# Altium PCB Copy of PCB1.PcbDoc
Units mil, origin at the board's own origin, x right, y up, seen from the top; angles counter-clockwise.
Board outline 2362.2 x 1181.1 mil, 2 copper layers (Top Layer, Bottom Layer); 102 components, 75 nets, 370 pads, 53 vias.
Unrouted connection lines stored in the file: 150.
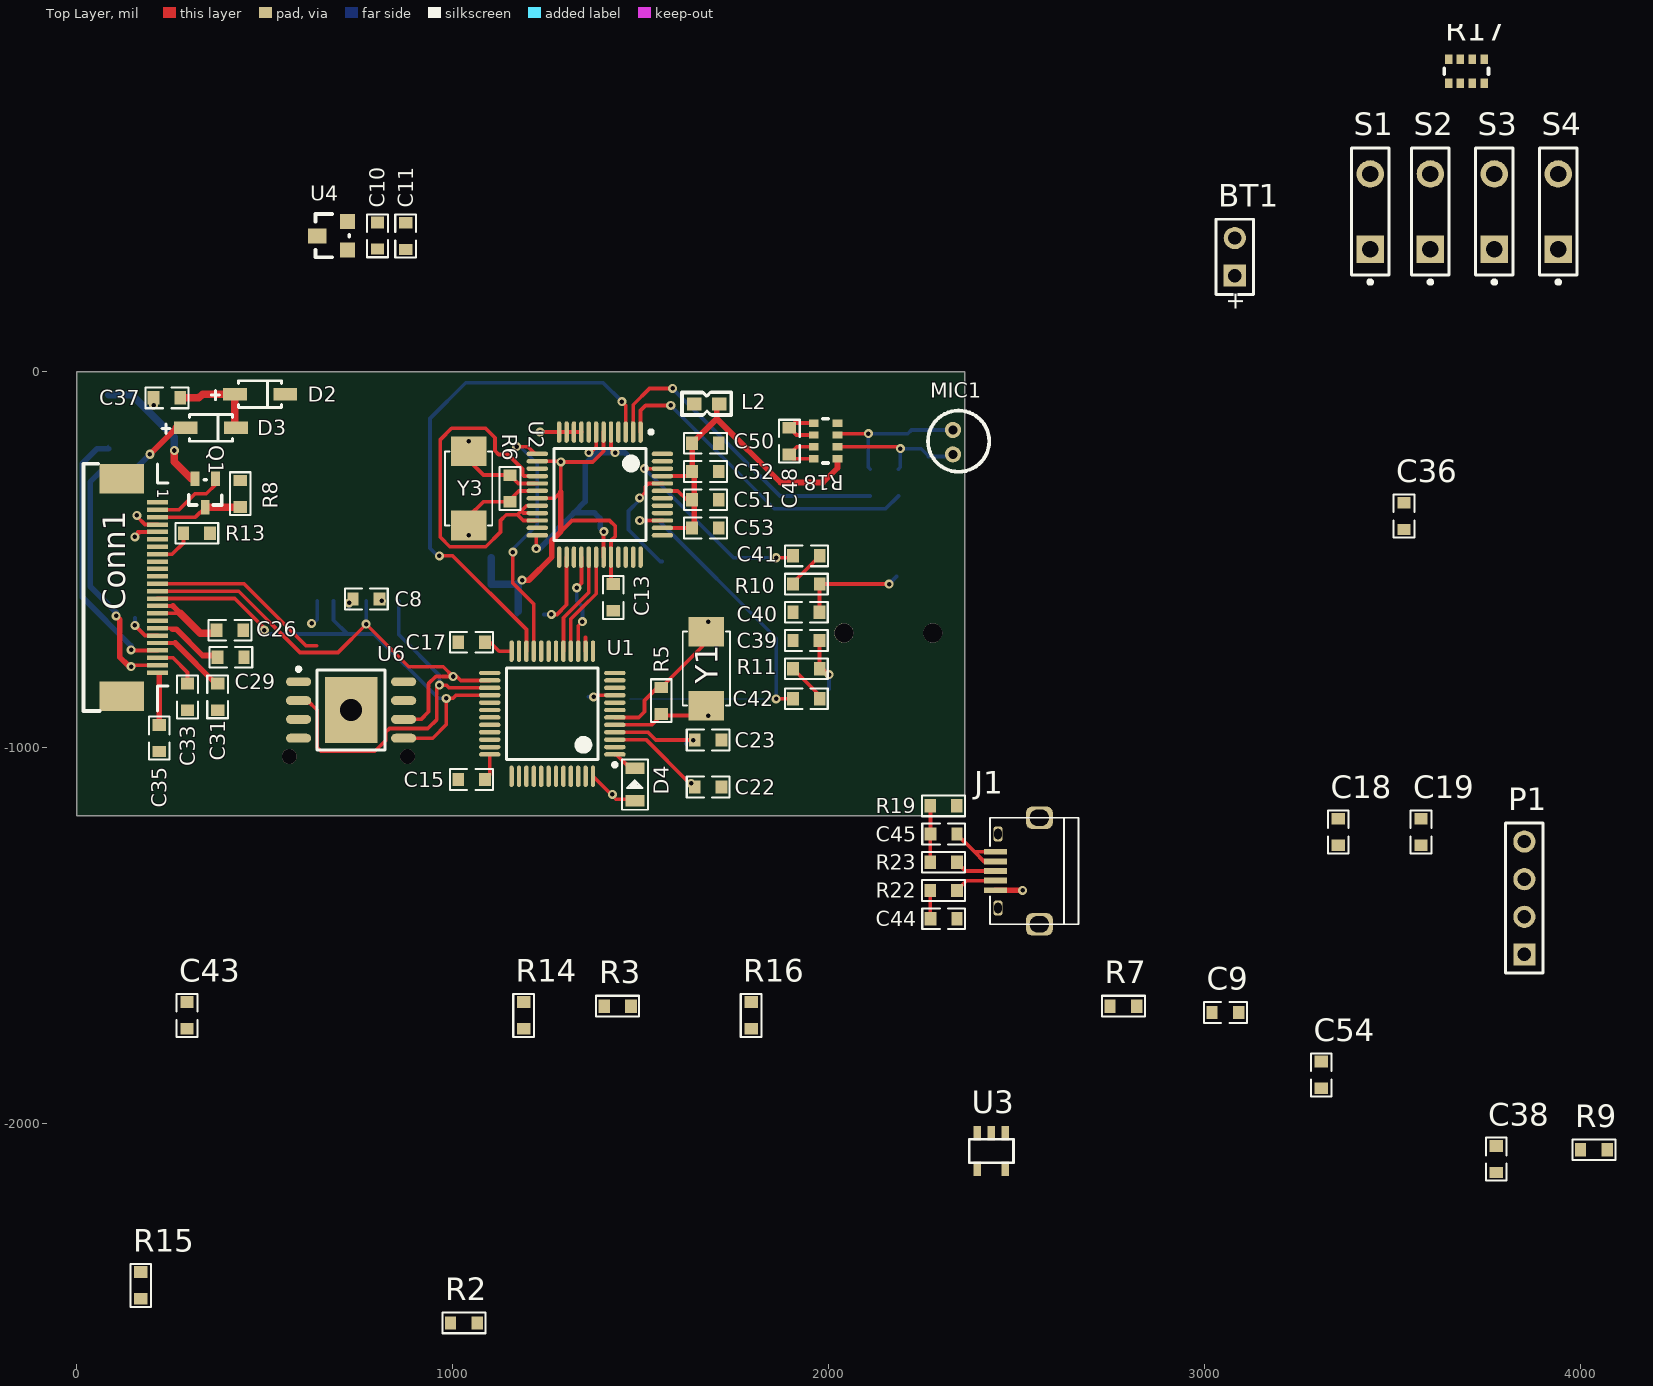
[diagram p0: Top Layer view]
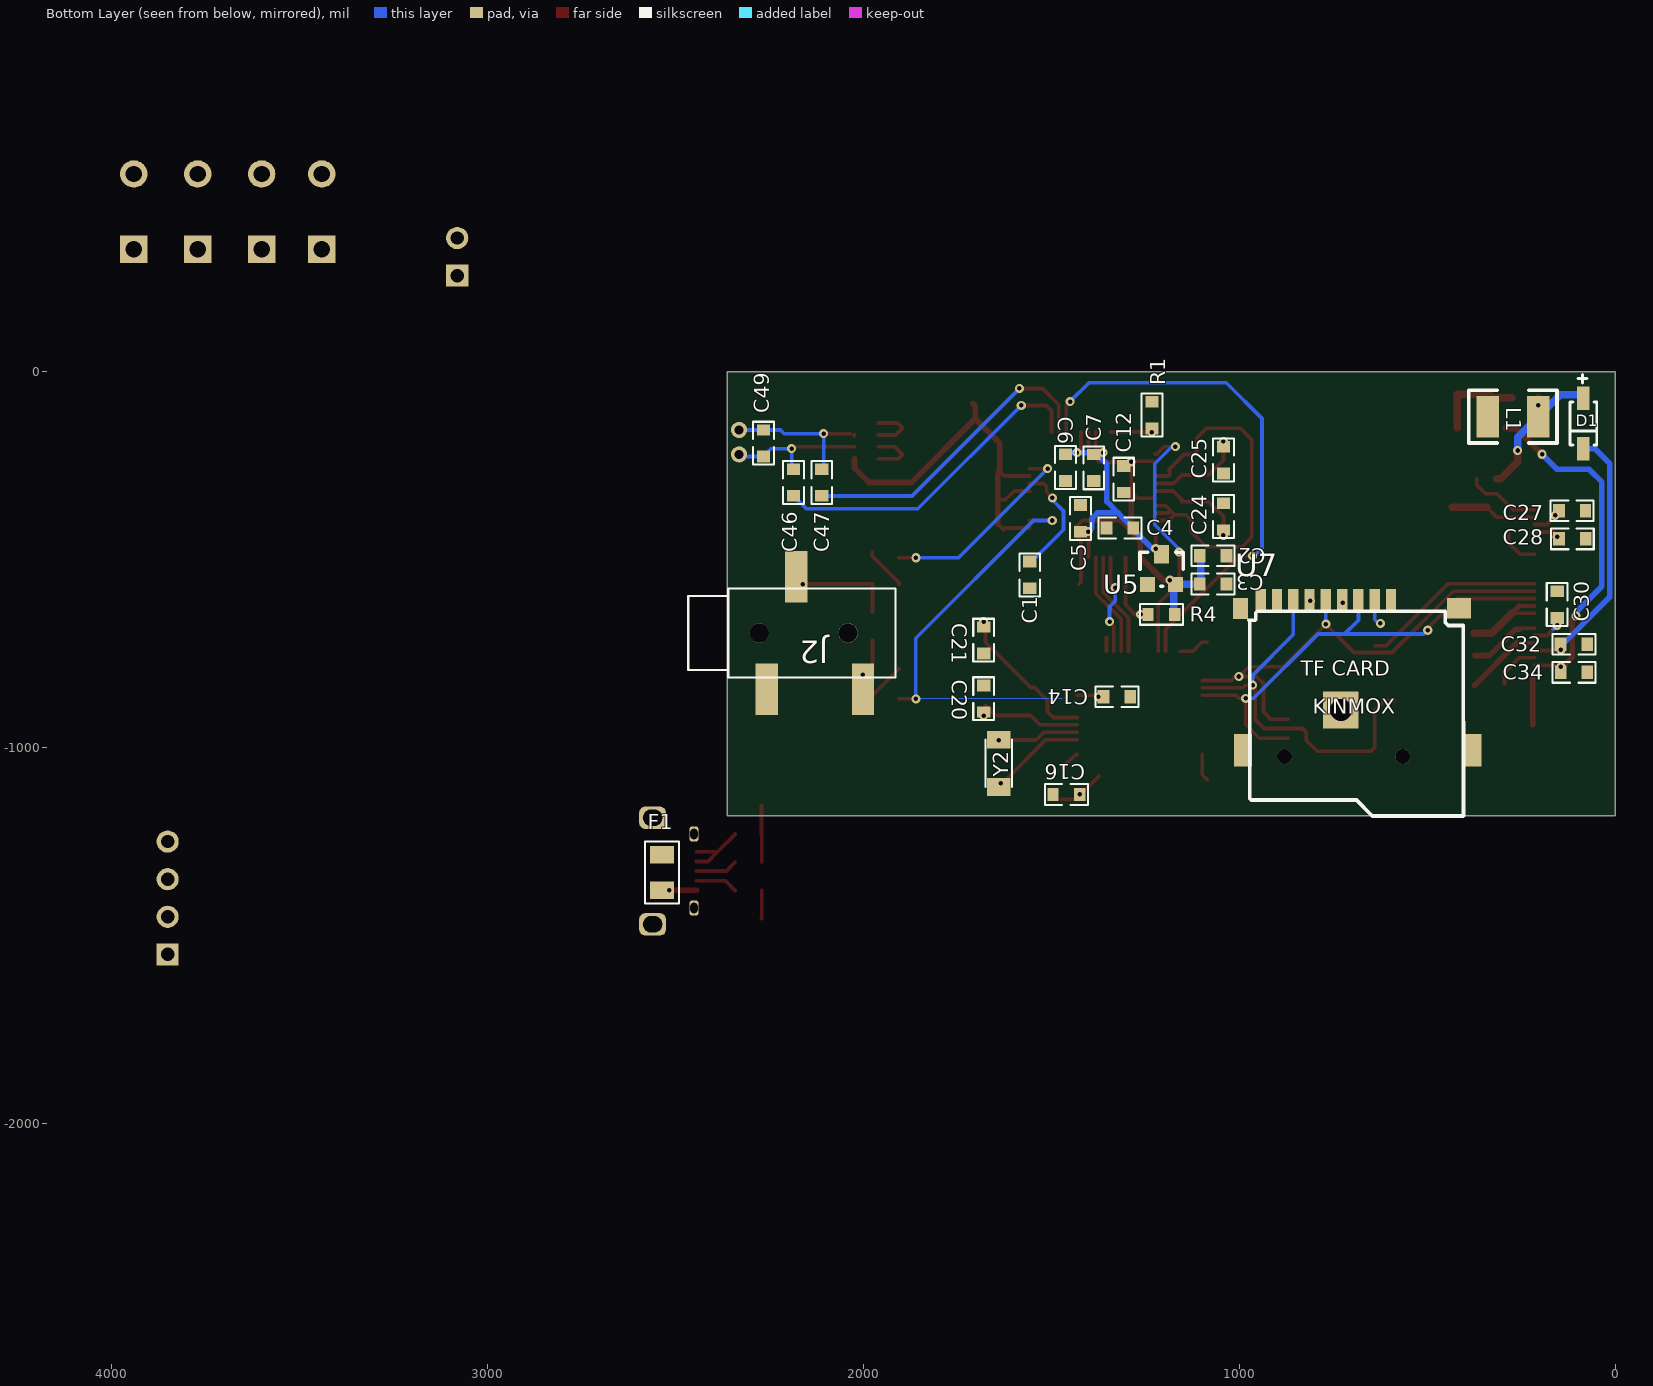
[diagram p1: Bottom Layer view, seen from below]

## Layer stack, top to bottom
Top Solder: solder mask 0.4, Solder Resist, Dk 3.5
Top Layer: signal copper 1.4
Dielectric 1: dielectric 12.6, FR-4, Dk 4.8
Bottom Layer: signal copper 1.4
Bottom Solder: solder mask 0.4, Solder Resist, Dk 3.5

## Board outline
0,-1181.1 2362.2,-1181.1 2362.2,0 0,0

## Design rules (kind name [scope] priority, off if disabled: settings)
Clearance [All] p1: gap=6 ignorepadtopadclearanceinfootprint=FALSE
HoleSize [All] p1: absolutevalues=TRUE maxlimit=100 minlimit=12 maxpercent=80.000 minpercent=20.000
PlaneConnect [All] p1: pad.planeconnectstyle=Relief pad.reliefexpansion=20 pad.reliefentries=4 pad.reliefconductorwidth=10 pad.reliefairgap=10 via.planeconnectstyle=Direct via.reliefexpansion=20 via.reliefentries=4 via.reliefconductorwidth=10 via.reliefairgap=10
PolygonConnect [All] p1: thpad.connectstyle=Relief thpad.reliefconductorwidth=10 thpad.reliefentries=4 thpad.polygonreliefangle="90 Angle" thpad.airgapwidth=10 smdpad.connectstyle=Relief smdpad.reliefconductorwidth=10 smdpad.reliefentries=4 smdpad.polygonreliefangle="90 Angle" smdpad.airgapwidth=10 via.connectstyle=Direct via.reliefconductorwidth=10 via.reliefentries=4 via.polygonreliefangle="90 Angle" via.airgapwidth=10
RoutingVias [All] p1: holewidth=12 width=24 viastyle="Through Hole" minholewidth=12 minwidth=24 maxholewidth=28 maxwidth=50
SilkToSilkClearance [All] p1: silktosilkclearance=5
SolderMaskExpansion [All] p1: expansion=4
UnRoutedNet [All] p1: checkbadconnections=TRUE
Width [All] p1: maxlimit=30 minlimit=6 preferedwidth=10
26 further rules are at their usual default settings.

## Components (designator, comment, footprint, x,y, rotation, side; value= is the part's Value field where it differs from the comment)
BT1 "Li-Pol" BAT-2 3080,305 r90 top
C1 "Cap" 0603C 1557.32,-540.91 r90 bottom value=1uF
C2 "Cap" 0603C 1070,-490 r180 bottom value=10uF
C3 "Cap" 0603C 1070,-565 r180 bottom value=100nF
C4 "Cap" 0603C 1317.76,-415.91 r0 bottom value=10uF
C5 "Cap" 0603C 1422.32,-390.47 r90 bottom value=100nF
C6 "Cap" 0603C 1462.32,-255.47 r270 bottom value=100nF
C7 "Cap" 0603C 1387.32,-255.91 r270 bottom value=100nF
C8 "Cap" 0603C 770.43,-605 r0 top value=100nF
C9 "Cap" 0603C 3055,-1704.57 r0 top value=100nF
C10 "Cap" 0603C 800,361.05 r90 top value=100nF
C11 "Cap" 0603C 875,360.18 r90 top value=10uF
C12 "Cap" 0603C 1307.32,-286.34 r90 bottom value=10uF
C13 "Cap" 0603C 1427.32,-600.91 r90 top value=100nF
C14 "Cap" 0603C 1325.43,-865 r0 bottom value=100nF
C15 "Cap" 0603C 1050.43,-1085 r0 top value=100nF
C16 "Cap" 0603C 1460,-1125 r180 bottom value=100nF
C17 "Cap" 0603C 1050.43,-720 r0 top value=100nF
C18 "Cap" 0603C 3355,-1224.57 r90 top value=100nF
C19 "Cap" 0603C 3575,-1224.57 r90 top value=100nF
C20 "Cap" 0603C 1680,-870 r90 bottom value=18pF
C21 "Cap" 0603C 1680,-714.57 r270 bottom value=18pF
C22 "Cap" 0603C 1679.57,-1105 r0 top value=18pF
C23 "Cap" 0603C 1679.57,-980 r0 top value=18pF
C24 "Cap" 0603C 1042.32,-385.91 r90 bottom value=18pF
C25 "Cap" 0603C 1042.32,-235.47 r270 bottom value=18pF
C26 "Cap" 0603C 407.57,-688 r180 top value=10uF
C27 "Cap" 0603C 115,-370 r0 bottom value=1uF
C28 "Cap" 0603C 114.57,-445 r0 bottom value=1uF
C29 "Cap" 0603C 410,-760 r180 top value=1uF
C30 "Cap" 0603C 155,-620 r270 bottom value=1uF
C31 "Cap" 0603C 375,-865 r90 top value=1uF
C32 "Cap" 0603C 110.43,-725 r0 bottom value=1uF
C33 "Cap" 0603C 295,-865.43 r90 top value=1uF
C34 "Cap" 0603C 110,-800 r0 bottom value=1uF
C35 "Cap" 0603C 220,-975 r90 top value=1uF
C36 "Cap" 0603C 3530,-384.57 r90 top value=10uF
C37 "Cap" 0603C 240,-70 r180 top value=10uF
C38 "Cap" 0603C 3775,-2094.57 r90 top value=47nF
C39 "Cap" 0603C 1940.47,-715.24 r0 top value=10nF
C40 "Cap" 0603C 1940.47,-640.24 r0 top value=10nF
C41 "Cap" 0603C 1940.91,-490.24 r180 top value=10uF
C42 "Cap" 0603C 1940.47,-870.24 r180 top value=10uF
C43 "Cap" 0603C 293.78,-1712.48 r90 top value=10nF
C44 "Cap" 0603C 2305.87,-1455 r180 top value=10nF
C45 "Cap" 0603C 2305.87,-1230 r180 top value=10nF
C46 "Cap" 0603C 2185.47,-295.24 r90 bottom value=1uF
C47 "Cap" 0603C 2110.47,-295.24 r90 bottom value=1uF
C48 "Cap" 0603C 1895.47,-185.24 r270 top value=10uF
C49 "Cap" 0603C 2265.47,-190.67 r270 bottom value=100pF
C50 "Cap" 0603C 1672.32,-190.91 r180 top value=10uF
C51 "Cap" 0603C 1672.32,-340.91 r180 top value=100nF
C52 "Cap" 0603C 1672.32,-265.91 r180 top value=100nF
C53 "Cap" 0603C 1672.32,-415.91 r180 top value=100nF
C54 "Cap" 0603C 3310,-1870.43 r90 top value=10uF
Conn1 "eInkScreen" FPC-24P-0.5 124.45,-249.41 r270 top locked
D1 "MBR0530" SOD123 85,-71.14 r90 bottom
D2 "MBR0530" SOD123 421.14,-60 r180 top locked
D3 "MBR0530" SOD123 290,-150 r180 top locked
D4 "1N4148" 0805LED2 1485,-1141.61 r90 top
F1 "PSMD075" 0805-1R 2535.43,-1332.24 r270 bottom
J1 "USB_MICRO" MicroUSB 2539.05,-1340.62 r270 top
J2 "Phonejack3" PJ-320B 2359.37,-695.24 r180 bottom
L1 "Inductor" 1210R 340,-120 r180 bottom locked value=10uH
L2 "600R/100M" L0603 1681.2,-85.91 r180 top
MIC1 "Micphone" mic_4015 2345.47,-185.24 r180 top
P1 "Dbg" HDR1X4 3850,-1550 r90 top
Q1 "Si1308" SOT323-N 342,-323 r180 top
R1 "Res3" 0603R 1232.32,-115.91 r270 bottom value=100K
R2 "Res3" 0603R 1030,-2530 r0 top value=100K
R3 "Res3" 0603R 1438.78,-1687.48 r0 top value=2K
R4 "Res3" 0603R 1207.32,-645.91 r180 bottom value=100K
R5 "Res3" 0603R 1555,-875.43 r270 top value=1M
R6 "Res3" 0603R 1152.32,-310.91 r270 top value=1M
R7 "Res3" 0603R 2783.78,-1687.48 r0 top value=10K
R8 "Res3" 0603R 435,-325 r270 top value=3
R9 "Res3" 0603R 4035,-2069.57 r0 top value=10
R10 "Res3" 0603R 1940.47,-565.24 r180 top value=20
R11 "Res3" 0603R 1940.47,-790.24 r180 top value=20
R13 "Res3" 0603R 319.57,-430 r0 top value=10K
R14 "Res3" 0603R 1188.78,-1712.48 r90 top value=8K
R15 "Res3" 0603R 170.63,-2430.28 r90 top value=22K
R16 "Res3" 0603R 1793.78,-1712.48 r90 top value=10K
R17 "1K" YC164 3742.99,767.01 r180 top
R18 "1K" YC164 1960.47,-231.73 r90 top
R19 "Res3" 0603R 2305.43,-1155 r180 top value=10K
R22 "Res3" 0603R 2305.43,-1380 r0 top value=22
R23 "Res3" 0603R 2305.43,-1305 r0 top value=22
S1 "SW-PB" SPST-2 3440,425.43 r90 top
S2 "SW-PB" SPST-2 3600,425.43 r90 top
S3 "SW-PB" SPST-2 3770,425.43 r90 top
S4 "SW-PB" SPST-2 3940,425.43 r90 top
U1 "GD32F103CBT6" LQFP48-7x7 1265,-910 r180 top
U2 "VS1053" LQFP48-7x7 1391.54,-327.24 r270 top locked
U3 "LTC4054-4.2C" SOT23-5 2469.8,-2025.51 r0 top
U4 "PT5110-3V3" SOT23 720.63,318.73 r90 top
U5 "PT5110-1V8" SOT23 1249.2,-566.54 r180 bottom
U6 "GD5F4GQ4UCYID" TSOP8+WSON8-6X5 730,-900 r0 top locked
U7 "SD_Card" TF_self-eject 596.85,-610 r180 bottom locked
Y1 "8M" XTAL-5032 1675,-790 r270 top
Y2 "32.768K" XTAL-3215 1640,-1042.01 r270 bottom
Y3 "12.288M" XTAL-5032 1042.32,-310.91 r270 top

## Footprints (in the part's own frame and the unit in brackets; to place one, negate y for a bottom-side part, rotate by r counter-clockwise, add the part's x,y. Pads: shape width x height; smd on the part's side, far side on the other; paste and mask are expansions set on the pad)
0603C [mm]
  rect 0.762x0.9 smd: 1(-0.9,0)
  rect 0.8x0.9 smd: 2(0.9,0)
  silkscreen extent -1.45,-0.7 1.45,0.7
0603R [mm]
  rect 0.762x0.9 smd: 1(-0.9,0)
  rect 0.8x0.9 smd: 2(0.9,0)
  silkscreen extent -1.45,-0.7 1.45,0.7
0805-1R [mm]
  rect 1.2x1.6 smd: 1(-1.2,0) 2(1.2,0)
  silkscreen extent -2.1,-1.15 2.1,1.15
0805LED2 [mm]
  rect 0.8x1.27 smd: 1(0,0) 2(2.2,0)
  silkscreen extent -0.6,-0.89 2.8,0.89
1210R [mil]
  rect 60x110 smd: 1(0,0) 2(135,0)
  silkscreen extent -50,-70 185,70
BAT-2 [mm] "Battery; 2 Leads"
  rect 1.5x1.5 hole 0.9: 1(-1.27,0)
  round 1.5 hole 0.9: 2(1.27,0)
  silkscreen extent -2.54,-1.27 2.54,1.27
FPC-24P-0.5 [mm]
  rect 0.3x1.4 smd: 1(2.5,2.3) 2(3,2.3) 3(3.5,2.3) 4(4,2.3) 5(4.5,2.3) 6(5,2.3) 7(5.5,2.3) 8(6,2.3) 9(6.5,2.3) 10(7,2.3) 11(7.5,2.3) 12(8,2.3) 13(8.5,2.3) 14(9,2.3) 15(9.5,2.3) 16(10,2.3) 17(10.5,2.3) 18(11,2.3) 19(11.5,2.3) 20(12,2.3) 21(12.5,2.3) 22(13,2.3) 23(13.5,2.3) 24(14,2.3)
  rect 2x3 smd: 25(15.6,-0.1) 26(0.9,-0.1)
  silkscreen extent -0.1,-2.7 16.6,3, body extent 0.2,-2.86 16.29,3.04, height 2
HDR1X4 [mm] "Connector; Header; 4 Position"
  rect 1.5x1.5 hole 0.9: 1(0,0)
  round 1.5 hole 0.9: 2(2.54,0) 3(5.08,0) 4(7.62,0)
  silkscreen extent -1.27,-1.27 8.89,1.27
L0603 [mil]
  rect 38x35 smd: 1(-28,0) 2(38.87,0)
  silkscreen extent -60,-31 71,30
LQFP48-7x7 [mm] "TSQFP, 48-Leads, Body 7.00x7.00mm, Pitch 0.50mm, IPC Medium Density"
  oval 1.45x0.3 smd: 1(-4.225,2.75) 2(-4.225,2.25) 3(-4.225,1.75) 4(-4.225,1.25) 5(-4.225,0.75) 6(-4.225,0.25) 7(-4.225,-0.25) 8(-4.225,-0.75) 9(-4.225,-1.25) 10(-4.225,-1.75) 11(-4.225,-2.25) 12(-4.225,-2.75) 25(4.225,-2.75) 26(4.225,-2.25) 27(4.225,-1.75) 28(4.225,-1.25) 29(4.225,-0.75) 30(4.225,-0.25) 31(4.225,0.25) 32(4.225,0.75) 33(4.225,1.25) 34(4.225,1.75) 35(4.225,2.25) 36(4.225,2.75)
  oval 0.3x1.45 smd: 13(-2.75,-4.225) 14(-2.25,-4.225) 15(-1.75,-4.225) 16(-1.25,-4.225) 17(-0.75,-4.225) 18(-0.25,-4.225) 19(0.25,-4.225) 20(0.75,-4.225) 21(1.25,-4.225) 22(1.75,-4.225) 23(2.25,-4.225) 24(2.75,-4.225) 37(2.75,4.225) 38(2.25,4.225) 39(1.75,4.225) 40(1.25,4.225) 41(0.75,4.225) 42(0.25,4.225) 43(-0.25,4.225) 44(-0.75,4.225) 45(-1.25,4.225) 46(-1.75,4.225) 47(-2.25,4.225) 48(-2.75,4.225)
  silkscreen extent -4.35,-3.1 3.1,3.57, body extent -3.5,-3.5 3.5,3.5, height 0.8
mic_4015 [mm]
  round 1.1 hole 0.6: 1(0.381,0.889) 2(0.381,-0.762)
  silkscreen extent -2.07,-2.07 2.07,2.07
MicroUSB [mm]
  round 0.635 on Top Overlay: 0(0.986,-3.776)
  rect 0.4x1.524 smd: 1(0.986,-2.426) 2(0.336,-2.426) 3(-0.314,-2.426) 4(-0.964,-2.426) 5(-1.614,-2.426)
  rrect50% 1.5x1.8 hole 1.1 slot 1.3 at 90 deg: 5(-3.911,0.543) 5(3.286,0.543)
  rrect50% 1x0.6 hole 0.5 slot 0.7 at 0 deg: 5(-2.812,-2.254) 5(2.188,-2.254)
  silkscreen extent -3.91,-2.81 3.29,3.19
PJ-320B [mm]
  round 1.3 hole 1.3: 0(2.1,0) 0(8.1,0)
  rect 1.5x3.5 smd: 1(9.1,-3.8) 3(4.6,3.8) 5(2.6,-3.8)
  silkscreen extent -2.7,-3 11.3,3, body extent -2.7,-5.2 11.3,5.2, height 5
SOD123 [mm]
  rect 1.6x0.85 smd: 1(0,0) 2(-3.4,0)
  silkscreen extent -3.15,-0.9 1.6,0.9
SOT23 [mil]
  rect 40x40 smd: 1(4.88,0.63) 3(79.88,0.63)
  rect 40x50 smd: 2(41.88,80.63)
  silkscreen extent -15,-4 100,86
SOT23-5 [mm]
  rect 0.5x1 smd: 1(0,0) 2(-0.95,0) 3(-1.9,0) 4(-1.9,-2.4) 5(0,-2.4)
  silkscreen extent -2.45,-2 0.55,-0.4
SOT323-N [mm]
  rect 0.6x1 smd: 1(-0.686,-0.965) 2(0.686,-0.965) 3(0,0.965)
  silkscreen extent -1.12,-0.89 1.12,0.81
SPST-2 [mm] "Switch; 2 Leads"
  rect 1.85x1.85 hole 1.1: 1(-2.54,0)
  round 1.85 hole 1.1: 2(2.54,0)
  silkscreen extent -4.89,-1.27 4.28,1.27
TF_self-eject [mm]
  rect 0.7x1.6 smd: 1(0,0) 2(-1.1,0) 3(-2.2,0) 4(-3.3,0) 5(-4.4,0) 6(-5.5,0) 7(-6.6,0) 8(-7.7,0) 9(-8.8,0)
  rect 1x1.4 smd: 10(-10.16,-0.508)
  rect 1.6x1.4 smd: 11(4.6,-0.5)
  rect 1.2x2.2 smd: 12(5.5,-10.1) 13(-10,-10.1)
  silkscreen extent -9.59,-14.52 4.9,-0.7, body extent -10.2,-17.1 5.8,0.72, height 1.85
TSOP8+WSON8-6X5 [mm] "TSOP, 8-Leads, Body 5.28x5.28mm, Pitch 1.27mm, Thermal Pad 4.45x3.55mm, IPC Medium Density"
  oval 1.7x0.6 smd: 1(-3.55,1.905) 2(-3.55,0.635) 3(-3.55,-0.635) 4(-3.55,-1.905) 5(3.55,-1.905) 6(3.55,-0.635) 7(3.55,0.635) 8(3.55,1.905)
  rect 2.4x2.5 hole 1.5: 4(0,0)
  rect 3.55x4.45 smd: 4(0,0)
  silkscreen extent -3.67,-2.7 2.3,2.88, body extent -2.7,-2.7 2.7,2.7, height 0.8
XTAL-3215 [mm]
  rect 1.2x1.6 smd: 1(-1.6,0) 2(1.6,0)
  silkscreen extent -1.6,-0.9 1.6,0.9
XTAL-5032 [mm]
  rect 2x2.4 smd: 1(-2.5,0) 2(2.5,0)
  silkscreen extent -2.5,-1.6 2.5,1.6
YC164 [mm]
  rect 0.5x0.65 smd: 1(0,0) 2(0.8,0) 3(1.6,0) 4(2.4,0) 5(2.4,-1.6) 6(1.6,-1.6) 7(0.8,-1.6) 8(0,-1.6)
  silkscreen extent -0.3,-0.98 2.7,-0.6, body extent -0.3,-1.6 2.7,0, height 1

## Part data
BT1: library part Battery, "Multicell Battery", LatestRevisionDate=17-Jul-2002, LatestRevisionNote="Re-released for DXP Platform.", PackageDescription="Battery; 2 Leads", PackageReference=BAT-2, Published=24-Mar-1999, Publisher="Altium Limited"
C1 C2 C3 C4 C5 C6 C7 C8 C9 C10 C11 C12 C13 C14 C15 C16 C17 C18 C19 C20 C21 C22 C23 C24 C25 C26 C27 C28 C29 C30 C31 C32 C33 C34 C35 C36 C37 C38 C39 C40 C41 C42 C43 C44 C45 C46 C47 C48 C49 C50 C51 C52 C53 C54: "Capacitor", LatestRevisionDate=17-Jul-2002, LatestRevisionNote="Re-released for DXP Platform.", PackageDescription="Radial Cap, Thru-Hole; 2 Leads; 0.3 in Pin Spacing", PackageReference=RAD-0.3, Published=8-Jun-2000, Publisher="Altium Limited"
Conn1: library part eINK_FPC24
D1 D2 D3: library part "D Schottky", "Schottky Diode", Code_JEDEC=DO-214-AA, LatestRevisionDate=17-Jul-2002, LatestRevisionNote="Re-released for DXP Platform.", PackageDescription="DO-214-AA/SMB; 2 C-Bend Leads; Body 5.3 x 3.6 mm, inc. leads (LxW)", PackageReference=SMB, Published=8-Jun-2000, Publisher="Altium Limited"
D4: library part "Diode 1N4148", "High Conductance Fast Diode", Code_JEDEC=DO-204-AH, ComponentLink1Description="Manufacturer Link", ComponentLink1URL=http://www.fairchildsemi.com/, ComponentLink2Description=Datasheet, ComponentLink2URL=http://www.fairchildsemi.com/ds/1N%2F1N4148.pdf, DatasheetVersion=1997, LatestRevisionDate=17-Jul-2002, LatestRevisionNote="Re-released for DXP Platform.", PackageDescription="Diode, Axial; Body 3.8 x 1.9 mm (LxDia. max), Lead Dia. 0.53 mm (max)", PackageReference=DO-35, Published=8-Jun-2000, Publisher="Altium Limited"
F1: library part "Fuse 2", "Fuse", LatestRevisionDate=17-Jul-2002, LatestRevisionNote="Re-released for DXP Platform.", PackageDescription="Thru-Hole; 2 Leads", PackageReference=PIN-W2/E2.8, Published=8-Jun-2000, Publisher="Altium Limited"
J2: "Jack Socket, 1/4\" [6.5mm], Thru-Hole, Vertical, 3-Conductor Open Circuit (Non-Normalling)", PackageDocument=2003, ComponentLink1Description="Manufacturer Link", ComponentLink1URL=http://www.cliffuk.co.uk/, DatasheetDocument=2003, DrillAndSlotSize="Corresponds to nominal value.", LatestRevisionDate=15-Jul-2004, LatestRevisionNote="Component Replaced.", PackageReference=S1VS_SSS, PCB_Layout="Complies with manufacturer's recommendation.", Published=15-Jul-2004, Publisher="Altium Limited"
L2: library part INDUCTOR_0_Dup1, "RoHS BEAD/600ohm 100Mhz Z=600Ω DCR<0.2Ω 800mA SMT L0603", Package=SMT, OriginalSymbolOrigin=(10,0), Pin Names Rotate=TRUE, Pin Names Visible=FALSE, Pin Numbers Visible=TRUE
MIC1: library part Micphone_0, mypage=13
P1: library part "Header 4", "Header, 4-Pin", LatestRevisionDate=17-Jul-2002, LatestRevisionNote="Re-released for DXP Platform.", Publisher="Altium Limited"
Q1: library part PwrMOS_N
R1 R2 R3 R4 R5 R6 R7 R8 R9 R10 R11 R13 R14 R15 R16 R19 R22 R23: "Resistor", LatestRevisionDate=29-May-2009, LatestRevisionNote="IPC-7351 Footprint Added.", PackageDescription="Chip Resistor", PackageReference=J1-0603, Published=8-Jun-2000, Publisher="Altium Limited"
R17 R18: library part ResPak-8P4R
S1 S2 S3 S4: "Switch", LatestRevisionDate=17-Jul-2002, LatestRevisionNote="Re-released for DXP Platform.", PackageDescription="Switch; 2 Leads", PackageReference=SPST-2, Published=24-Mar-1999, Publisher="Altium Limited"
U1: library part STM32F103CxT6
U3: library part LTC4054
U4 U5: library part PT5110
U6: library part W25Qxx
Y1 Y2 Y3: library part XTAL, "Crystal Oscillator", LatestRevisionDate=17-Jul-2002, LatestRevisionNote="Re-released for DXP Platform.", PackageDescription="Crystal, Thru-Hole; 2 Leads; Body 3.1 x 8.2 mm (Dia.xH)", PackageReference=R38, Published=8-Jun-2000, Publisher="Altium Limited"
L1: Code_IEC=1005, Code_JEITA=0402, LatestRevisionDate=29-May-2009, LatestRevisionNote="IPC-7351 Footprint Added.", PackageDescription="Chip Inductor", PackageReference=0402-A, Published=8-Jun-2000, Publisher="Altium Limited"

## Via types
v1: diameter 24, hole 12, Top Layer to Bottom Layer, 51 vias
v2: diameter 39.37, hole 39.37, Top Layer to Bottom Layer, 2 vias

## Nets (pads, with @x,y where several pads share a name; then routed paths per layer and width w, separated by ;. In a path a pad name is that pad's centre, name@x,y a point inside that pad or via, vN(x,y) a via of type N, cw(c..) or ccw(c..) an arc to the next point about the centre after c; other vN are vias at no path point)
1V8: C4.1 C5.1 C6.1 C7.1 U2.5 U2.7 U2.24 U2.31 U5.2 | length 780.6
  Top Layer w10: v1(1222.32,-470.91) 1222.32,-438.39 U2.24 ; v1(1362.32,-215.91) 1366.69,-215.91 1381.69,-200.91 U2.7 ; U2.31 1401.38,-426.85 v1(1402.32,-425.91) ; U2.5 1421.32,-161.17 1421.32,-204.91 v1(1432.32,-215.91)
  Bottom Layer w10: C4.1@1282.32,-420.16 C4.1
  Bottom Layer w15: v1(1222.32,-470.91) 1231.57,-470.91 C4.1@1282.32,-420.16 ; C4.1 1322.32,-375.91 ; v1(1362.32,-215.91) 1382.76,-215.91 C7.1 ; v1(1402.32,-425.91) 1392.32,-415.91 1392.32,-390.91 1377.32,-375.91 1322.32,-375.91 ; C6.1 1458.19,-215.91 v1(1432.32,-215.91) 1391.89,-215.91 C7.1 ; 1322.32,-375.91 1352.32,-345.91 1352.32,-245.91 1377.76,-220.47 C7.1
3V3: C2.1 C3.1 C8.1 C9.2 C12.2 C13.2 C14.2 C15.2 C16.2 C17.2 C18.2 C19.2 C26.2 C36.2 Conn1.15 Conn1.16 D4.1 L1.1 L2.2 P1.1 R4.2 R16.1 R17.5 R17.6 R17.7 R17.8 U1.9 U1.24 U1.36 U1.48 U2.6 U2.14 U2.19 U2.32 U4.2 U5.3 U6.3 U6.7 U6.8 U7.4 | length 1871.4
  Top Layer w10: Conn1.16 276.11,-643.11 ; Conn1.15 256.42,-623.43 ; v1(725,-615) C8.1 ; C15.2 1098.66,-1072.2 U1.36 ; C17.2 1100,-720 1123.66,-743.66 U1.24 ; U2.19 1271.14,-337.09 1287.76,-320.47 v1(1287.76,-240.47) ; U2.14 1285.94,-238.66 v1(1287.76,-240.47) ; 1287.76,-425.47 1317.32,-395.91 1417.32,-395.91 1432.32,-410.91 1432.32,-438.43 1421.06,-449.69 U2.32 1421.06,-559.21 C13.2 ; U1.48 v1@1423.25,-1126.32 ; v1(1375,-865) 1379.21,-860.79 U1.9 ; U2.6 1401.38,-211.85 1372.76,-240.47 v1(1287.76,-240.47) ; 1434.21,-1137.28 D4.1@1472.72,-1137.28
  Top Layer w15: 256.42,-623.43 276.11,-643.11 ; v1(1185,-555) 1202.23,-555 1263.82,-493.41 1263.82,-449.41 1287.76,-425.47 1287.76,-320.47
  Top Layer w20: 276.11,-643.11 329,-696 C26.2@375,-696
  Bottom Layer w10: U7.4@725,-630 v1(725,-615) ; C3.1@1102.32,-565.04 C3.1@1103.19,-565.91 ; U5.3 1180.23,-555 v1(1185,-555) U5.3@1175,-565 ; R4.2 1169.32,-643.34 R4.2@1175,-637.66 ; C14.2 v1(1375,-865) ; C16.2 v1(1425,-1124.57)
  Bottom Layer w20: C3.1@1102.32,-565.04 C2.1@1102.32,-495.91 ; C3.1@1103.19,-565.91 U5.3 ; R4.2@1175,-637.66 U5.3@1175,-565
3V3_A: C50.2 C51.2 C52.2 C53.2 L2.1 R18.8 U2.38 U2.43 U2.45 | length 1058.2
  Top Layer w10: U2.38 1622.24,-415.83 C53.2@1627.11,-420.69 ; U2.43 1598.82,-317.4 1622.32,-340.91 C51.2 C51.2@1642.32,-340.91 ; U2.45 1625.2,-278.03 C52.2@1631.46,-271.77 ; C53.2@1631.89,-415.91 C53.2@1642.32,-405.47 ; C52.2@1634.61,-268.62 1639.32,-263.91 1642.32,-260.91 1642.32,-276.34 C52.2@1639.32,-273.34
  Top Layer w15: C52.2@1639.32,-263.91 1636.89,-261.47 C50.2 1702.32,-125.47 ; C53.2@1642.32,-405.47 1642.32,-340.91 C52.2@1642.32,-276.34 ; L2.1 1707.32,-85.91 1702.32,-90.91 1702.32,-125.47 ; R18.8 2023.46,-256.54 1985,-295 1871.85,-295 1702.32,-125.47
5V: C54.2 F1.1 R2.1 U3.4
C\H\R\G\: R2.2 U1.38 U3.1
DREQ: U1.25 U2.8
GDR: Conn1.2 Q1.1 R7.2 | length 197.6
  Top Layer w10: Conn1.2 272.48,-367.52 315,-325 345,-325 369,-301 Q1.1
GND: BT1.2 C1.1 C2.2 C3.2 C4.2 C5.2 C6.2 C7.2 C8.2 C9.1 C10.1 C11.1 C12.1 C13.1 C14.1 C15.1 C16.1 C17.1 C18.1 C19.1 C20.2 C21.2 C22.2 C23.2 C24.2 C25.2 C26.1 C27.1 C28.1 C29.1 C30.1 C31.1 C32.1 C33.1 C34.1 C35.1 C36.1 C38.1 C39.1 C40.1 C43.1 C44.1 C45.1 C50.1 C51.1 C52.1 C53.1 C54.1 Conn1.17 Conn1.25 Conn1.26 D2.2 J1.4 J1.5 J2.5 P1.4 R1.1 R3.2 R7.1 R8.1 R13.2 R15.2 R18.5 S1.1 S2.1 S3.1 S4.1 U1.8 U1.23 U1.35 U1.44 U1.47 U2.4 U2.16 U2.20 U2.21 U2.22 U2.35 U2.37 U2.40 U2.41 U2.47 U3.2 U4.1 U5.1 U6.4 U7.6 U7.10 U7.11 U7.12 U7.13 | length 1246.4
  Top Layer w10: C8.2 v1(810.87,-610) ; U2.22 1187.56,-396.14 1172.32,-380.91 ; U2.21 1187.87,-376.46 1182.32,-370.91 ; U2.20 1196.46,-356.77 1182.32,-370.91 ; U2.16 1189.45,-278.03 1185.65,-274.24 1185.65,-259.24 1147.32,-220.91 1122.32,-220.91 1112.32,-210.91 1112.32,-175.91 1087.32,-150.91 997.32,-150.91 967.32,-180.91 967.32,-440.91 992.32,-465.91 1087.92,-465.91 1127.32,-426.5 1127.32,-395.91 1142.32,-380.91 1172.32,-380.91 ; C45.1 2341.3,-1230.87 2387.52,-1277.09 ; J1.4 2413.11,-1302.68 2387.52,-1277.09 ; J1.5@2443.54,-1277.09 2387.52,-1277.09 ; 1172.32,-380.91 1182.32,-370.91
  Bottom Layer w10: v1(810.87,-610) U7.6
KEY1: R17.1 S1.2 U1.18
KEY2: R17.2 S2.2 U1.19
KEY3: R17.3 S3.2 U1.20
KEY4: R17.4 S4.2 U1.39
MICN: C47.1 U2.2 | length 839.3
  Top Layer w10: U2.2 1480.12,-88.11 1523.23,-45 v1(1585,-45)
  Bottom Layer w10: v1(1585,-45) 1870.67,-330.67 C47.1
MICP: C46.1 U2.1 | length 876.8
  Top Layer w10: U2.1 1499.8,-103.43 1513.23,-90 v1(1580,-90)
  Bottom Layer w10: v1(1580,-90) 1855,-365 2151.14,-365 C46.1
NetC1_2: C1.2 U2.44 | length 307.3
  Top Layer w10: v1(1497.32,-335.91) 1512.32,-320.91 1512.32,-306.5 1521.11,-297.72 U2.44
  Bottom Layer w10: v1(1497.32,-335.91) 1497.32,-340.91 1467.32,-370.91 1467.32,-420.91 1551.89,-505.47 C1.2
NetC27_2: C27.2 Conn1.4 | length 66.6
  Top Layer w10: v1(160,-382.5) 160,-385 181.89,-406.89 Conn1.4
NetC28_2: C28.2 Conn1.5 | length 77.6
  Top Layer w10: v1(155,-440) 168.42,-426.57 ; 163.42,-426.57 Conn1.5
  Bottom Layer w10: C28.2 v1(155,-440)
NetC29_2: C29.2 Conn1.18 | length 189.2
  Top Layer w10: Conn1.18 252.48,-682.48 255,-685
  Top Layer w15: 255,-685 265,-685 335,-755 C29.2@374.13,-755
NetC30_2: C30.2 Conn1.19 | length 105
  Top Layer w10: v1(155,-675) 182.16,-702.16 Conn1.19
  Bottom Layer w10: C30.2 v1(155,-675) 165,-685
NetC31_2: C31.2 Conn1.20 | length 206.7
  Top Layer w10: Conn1.20 262.28,-721.85
  Top Layer w15: 262.28,-721.85 C31.2@375,-834.57
NetC33_2: C33.2 Conn1.22 | length 126.1
  Top Layer w10: Conn1.22 256.22,-761.22 295,-800 C33.2
NetC35_2: C35.2 Conn1.24 | length 134
  Top Layer w15: C35.2 Conn1.24@220,-805.59
NetC37_1: C37.1 D2.1 D3.2 | length 239.9
  Top Layer w20: C37.1 325.43,-70 335.43,-60 D2.1 D3.2@421.14,-150
NetC37_2: C37.2 D1.1 L1.2 Q1.2 | length 380.4
  Top Layer w20: v1(204.57,-89.57) C37.2 ; v1(260,-210) 260,-240 305,-285 Q1.2
  Bottom Layer w20: D1.1@85,-61.14 146.14,-61.14 L1.2 260,-175 v1(260,-210)
NetC38_2: C38.2 R9.1
NetC39_2: C39.2 J2.1 R11.1 | length 145.6
  Top Layer w10: C39.2 R11.1 1985.47,-790.24 v1(2001.1,-805.87)
  Bottom Layer w10: J2.1 v1(2001.1,-805.87)
NetC40_2: C40.2 J2.3 R10.1 | length 287.9
  Top Layer w10: C40.2 R10.1 v1(2160.47,-565.24)
  Bottom Layer w10: v1(2160.47,-565.24) J2.3@2180.47,-545.24
NetC41_1: C41.1 R10.2 | length 113.7
  Top Layer w10: R10.2 1905.04,-561.54 C41.1 C41.1@1976.34,-481.1
NetC41_2: C41.2 U2.46 | length 541.7
  Top Layer w10: v1(1509.88,-258.35) U2.46 ; v1(1860.47,-495.24) C41.2@1905.47,-495.24
  Bottom Layer w10: v1(1509.88,-258.35) 1746.77,-495.24 v1(1860.47,-495.24)
NetC42_1: C42.1 R11.2 | length 109.4
  Top Layer w10: R11.2 1975.91,-861.1 C42.1
NetC42_2: C42.2 U2.39 | length 1148.6
  Top Layer w10: v1(1497.56,-396.14) U2.39 ; v1(1860.47,-870.24) C42.2
  Bottom Layer w0: 1470.47,-870.24 v1(1860.47,-870.24)
  Bottom Layer w10: v1(1497.56,-396.14) 1547.56,-396.14 1860.47,-709.06 v1(1860.47,-870.24)
NetC46_2: C46.2 C49.2 MIC1.1 R18.7 | length 378.5
  Top Layer w10: R18.7 2185.47,-200.24 v1(2190.47,-205.24)
  Bottom Layer w10: C46.2 2190.47,-254.8 v1(2190.47,-205.24) 2246.34,-205.24 2266.34,-225.24 C49.2 2324.61,-226.1 MIC1.1
NetC47_2: C47.2 C49.1 MIC1.2 R18.6 | length 397.9
  Top Layer w10: R18.6 R18.6@2024.96,-170.24 ; R18.6@2035.47,-165.24 v1(2105.47,-165.24)
  Bottom Layer w10: C47.2 2105.47,-254.8 v1(2105.47,-165.24) 2210.47,-165.24 2220.47,-155.24 C49.1 MIC1.2
NetC48_1: C48.1 R18.3 R18.4 | length 143.5
  Top Layer w10: R18.3 1914.41,-168.74 C48.1 1908.54,-136.73 1959.96,-136.73 R18.4
NetC48_2: C48.2 R18.1 R18.2 | length 143
  Top Layer w10: R18.1 1906.54,-231.73 C48.2 1915.91,-200.24 R18.2
NetConn1_8: Conn1.8 R13.1 | length 107.3
  Top Layer w10: Conn1.8 254.37,-485.63 284.13,-455.87 R13.1
NetD4_2: D4.2 U1.1 | length 53.2
  Top Layer w10: U1.1 1434.88,-1018.27 D4.2@1470,-1053.39
NetF1_2: F1.2 J1.1 | length 72.1
  Top Layer w15: J1.1 2514.88,-1379.45 v1(2515.43,-1380)
NetJ1_2: J1.2 R22.2 | length 113.5
  Top Layer w10: R22.2 2367.01,-1353.86 J1.2
NetJ1_3: J1.3 R23.2 | length 112.3
  Top Layer w10: R23.2 2364.13,-1328.27 J1.3
NetR1_2: R1.2 U2.9 U2.10 U2.11 U2.12 | length 110
  Top Layer w10: v1(1232.32,-160.91) U2.12 U2.11 U2.10 U2.9
NetR3_1: R3.1 U3.5
NetR4_1: R4.1 U2.26 | length 197.5
  Top Layer w10: v1(1262.32,-645.91) 1277.32,-645.91 1302.95,-620.28 U2.26
  Bottom Layer w10: R4.1 v1(1262.32,-645.91)
NetR9_2: R9.2 U2.42
RESE: Conn1.3 Q1.3 R8.2 | length 231.1
  Top Layer w10: Conn1.3 315.8,-387.2 Q1.3 ; R8.2@434.43,-361 R8.2
  Top Layer w20: Q1.3 R8.2@434.43,-361
RST: C43.2 Conn1.10 R16.2 U1.7
ScrBusy: Conn1.9 U1.46
ScrD/C: Conn1.11 U1.45
SPI1_CS#: U1.14 U2.23 | length 36.8
  Top Layer w10: U1.14 1353.58,-706.9
SPI1_MISO: U1.16 U2.30 | length 278.1
  Top Layer w10: U1.16 1314.21,-658.26 1345.47,-627 1345.63,-627 1381.69,-590.93 U2.30
SPI1_MOSI: U1.17 U2.29 | length 278.1
  Top Layer w10: U1.17 1294.85,-743.34 1294.85,-655 1338.85,-611 1339,-611 1362.01,-587.99 U2.29
SPI1_SCK: U1.15 U2.28 | length 267
  Top Layer w10: v1(1330,-575) 1342.32,-562.68 U2.28 ; U1.15 1333.9,-676.1 v1(1345,-665)
  Bottom Layer w10: v1(1330,-575) 1330,-610 1346.24,-626.24 1345,-627.47 v1(1345,-665)
SPI2_CS#1: Conn1.12 U1.29 | length 491.2
  Top Layer w10: Conn1.12 445.37,-564.37 610,-729 638,-729
SPI2_CS#2: U1.30 U7.2 | length 69.2
  Bottom Layer w10: v1(625,-670) 630,-670 640.16,-659.84 U7.2
SPI2_CS#3: U1.31 U6.1
SPI2_MISO: U1.27 U6.2 U7.7 | length 1029.2
  Top Layer w10: U6.2 614,-875 640,-901 640,-1000 650,-1010 793.04,-1010 822,-981.04 822,-959 832,-949 934,-949 958,-925 958,-841 v1(965,-834) 983,-834 990.1,-841.1 U1.27
  Bottom Layer w10: U7.7 856.69,-699.69 965,-808 v1(965,-834)
SPI2_MOSI: Conn1.14 U1.28 U6.5 U7.3 | length 1310.2
  Top Layer w10: Conn1.14 420.74,-603.74 505,-688 v1(499,-688) ; U6.5 947,-975 983,-939 v1(983,-869) 1001,-869 1009.21,-860.79 U1.28
  Bottom Layer w10: v1(499,-688) 500,-688 510,-698 720,-698 ; U7.3 683.46,-661.46 720,-698 ; v1(983,-869) 962,-869 791,-698 720,-698
SPI2_SCK: Conn1.13 U1.26 U6.6 U7.5 | length 1328.5
  Top Layer w10: Conn1.13 431.06,-584.06 594,-747 695,-747 v1(770.08,-671.92) 883.16,-785 975,-785 v1(1001,-811) ; U6.6 916,-925 936,-905 936,-830 955,-811 v1(1001,-811) ; U1.26 1021.42,-821.42 1011,-811 v1(1001,-811)
  Bottom Layer w10: v1(770.08,-671.92) U7.5
STM32_X32I: C22.1 U1.3 Y2.2 | length 283.3
  Top Layer w10: U1.3 1513.9,-978.9 1630,-1095 v1(1634.13,-1095) C22.1
  Bottom Layer w10: v1(1634.13,-1095) 1630,-1095 Y2.2
STM32_X32O: C23.1 U1.4 Y2.1 | length 251.4
  Top Layer w10: U1.4 1519.21,-959.21 1540,-980 v1(1640,-980) 1640,-984.13 C23.1
  Bottom Layer w10: Y2.1@1620,-990 1630,-980 v1(1640,-980)
STM32_XI: C20.1 R5.2 U1.5 Y1.2 | length 274.4
  Top Layer w10: U1.5 1530.47,-939.53 1555,-915 1648.43,-915 Y1.2
  Bottom Layer w10: v1(1680,-915) C20.1
STM32_XO: C21.1 R5.1 U1.6 Y1.1 | length 386.6
  Top Layer w10: U1.6 1495.16,-919.84 1510,-905 1510,-875 1545,-840 R5.1 1675,-720 Y1.1
  Bottom Layer w10: C21.1 v1(1680,-665)
SWDCK: P1.3 U1.37
SWDIO: P1.2 U1.34
USB_D_N: C44.2 R22.1 U1.32 | length 75.2
  Top Layer w10: R22.1 2270,-1454.57 C44.2
USB_D_P: C45.2 R19.2 R23.1 U1.33 | length 150.4
  Top Layer w10: R23.1 2270,-1230.43 C45.2 2270.43,-1155.43 R19.2
USB_PU: R19.1 U1.41
VBAT: BT1.1 C10.2 C11.2 R14.2 U3.3 U4.3
VGH: C32.2 Conn1.21 D1.2 | length 720.2
  Top Layer w10: v1(145,-740) 146.54,-741.53 Conn1.21
  Bottom Layer w0: D1.2@75,-205 D1.2@85,-195
  Bottom Layer w10: v1(145,-740) C32.2@145,-730
  Bottom Layer w15: D1.2 75,-205 55,-205 15,-245 15,-600 C32.2@145,-730
VGL: C34.2 Conn1.23 D3.1 | length 931.8
  Top Layer w10: v1@135.91,-780.91 Conn1.23
  Top Layer w15: v1(105,-650) 115,-660 115,-760 135.91,-780.91 140,-785 v1(145,-785) ; v1(195,-220) D3.1@265,-150
  Top Layer w20: D3.1@265,-150 D3.1
  Bottom Layer w15: v1(105,-650) 105,-640 36,-571 36,-294 70,-260 155,-260 v1(195,-220)
VS_SHDN: U1.22 U2.3 | length 1403.5
  Top Layer w10: v1(965,-490) 1000,-490 1196.1,-686.1 U1.22 ; v1(1450,-80) 1460.43,-90.43 U2.3
  Bottom Layer w10: v1(965,-490) 960,-490 940,-470 940,-125 1035,-30 1400,-30 v1(1450,-80)
VS_XI: C24.1 R6.2 U2.18 Y3.2 | length 257.4
  Top Layer w10: Y3.2@1042.32,-440.91 v1(1042.32,-435.91) ; Y3.2 1042.32,-385.91 1081.89,-346.34 R6.2 1152.32,-340.91 1175.83,-317.4 U2.18
  Bottom Layer w10: v1(1042.32,-435.91) C24.1
VS_XO: C25.1 R6.1 U2.17 Y3.1 | length 246
  Top Layer w10: Y3.1 1042.32,-235.91 1081.89,-275.47 R6.1 1174.57,-297.72 U2.17
  Bottom Layer w10: C25.1 v1(1042.32,-185.91)
VSp: R14.1 R15.1 U1.10
XDCS: U1.21 U2.13 | length 685.4
  Top Layer w10: v1(1160,-480) 1160,-562.53 1215.79,-618.31 U1.21 ; v1(1170,-200) 1200,-200 1218.98,-218.98 U2.13
  Bottom Layer w10: v1(1160,-480) 1160,-472.67 1225,-407.67 1225,-245 1180,-200 v1(1170,-200)
pads on no net: Conn1.1 Conn1.6 Conn1.7 J1.0 J2.0 U1.2 U1.11 U1.12 U1.13 U1.40 U1.42 U1.43 U2.15 U2.25 U2.27 U2.33 U2.34 U2.36 U2.48 U7.1 U7.8 U7.9
copper on no net:
  other v2: 565.35,-1023.39 880.32,-1023.39

## Text inside footprints (layer, text, board x,y; h text height)
BT1: Top Overlay "+" at 3102.72,160.51 h45.28 r90
Conn1: Top Overlay "1" at 215,-311.84 h30 r270
U7: Bottom Overlay "KINMOX" at 804.55,-909.64 h39.37; Bottom Overlay "TF CARD" at 836.55,-809.64 h39.37